# Altium PCB DC_DC.PcbDoc
Units mil, origin at the board's own origin, x right, y up, seen from the top; angles counter-clockwise.
Board outline 2140 x 1405 mil, 4 copper layers (Top Layer, Layer 1, Layer 2, Bottom Layer), stack 60.866 mil thick; 50 components, 27 nets, 171 pads, 174 vias.
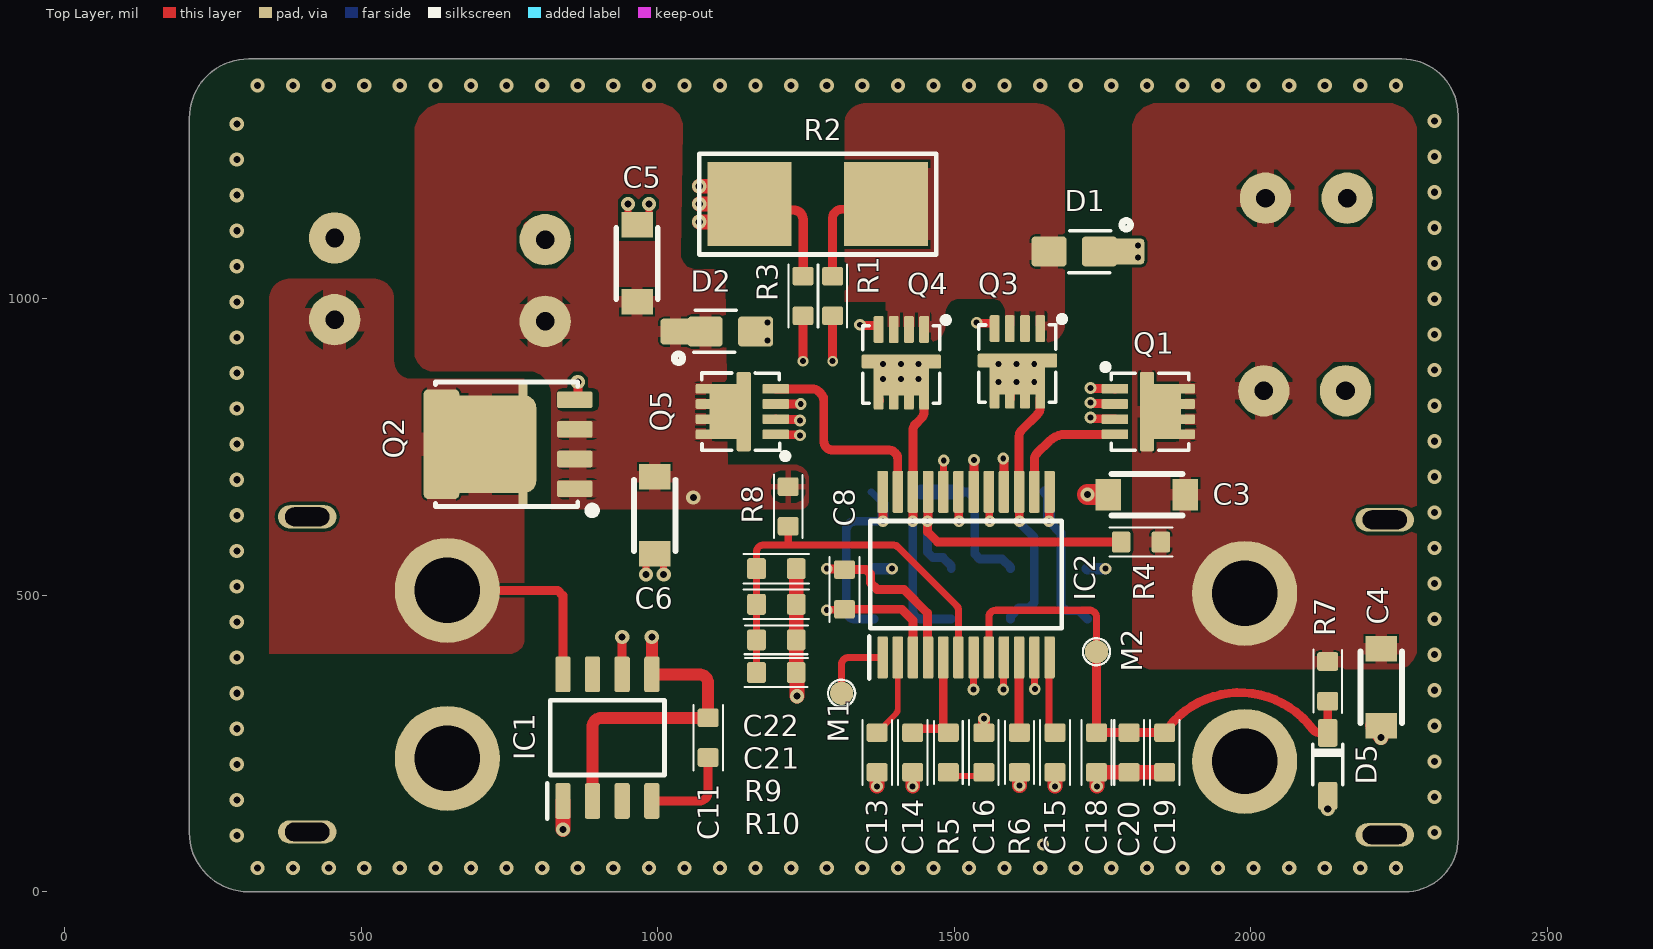
[diagram p0: Top Layer view]
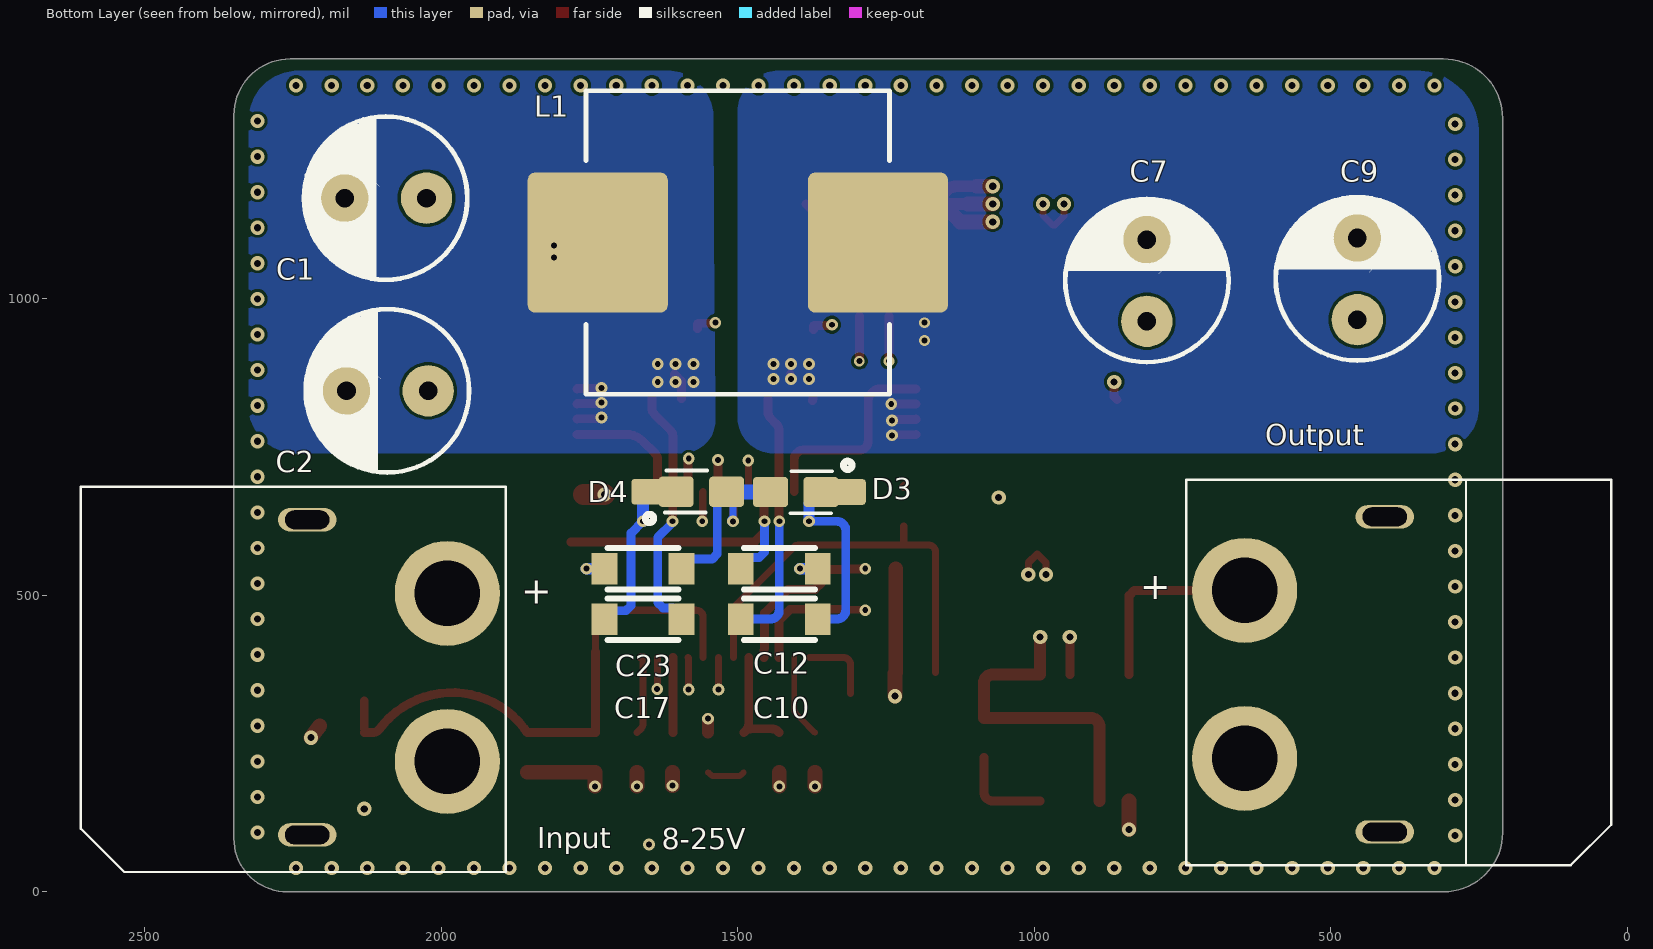
[diagram p1: Bottom Layer view, seen from below]
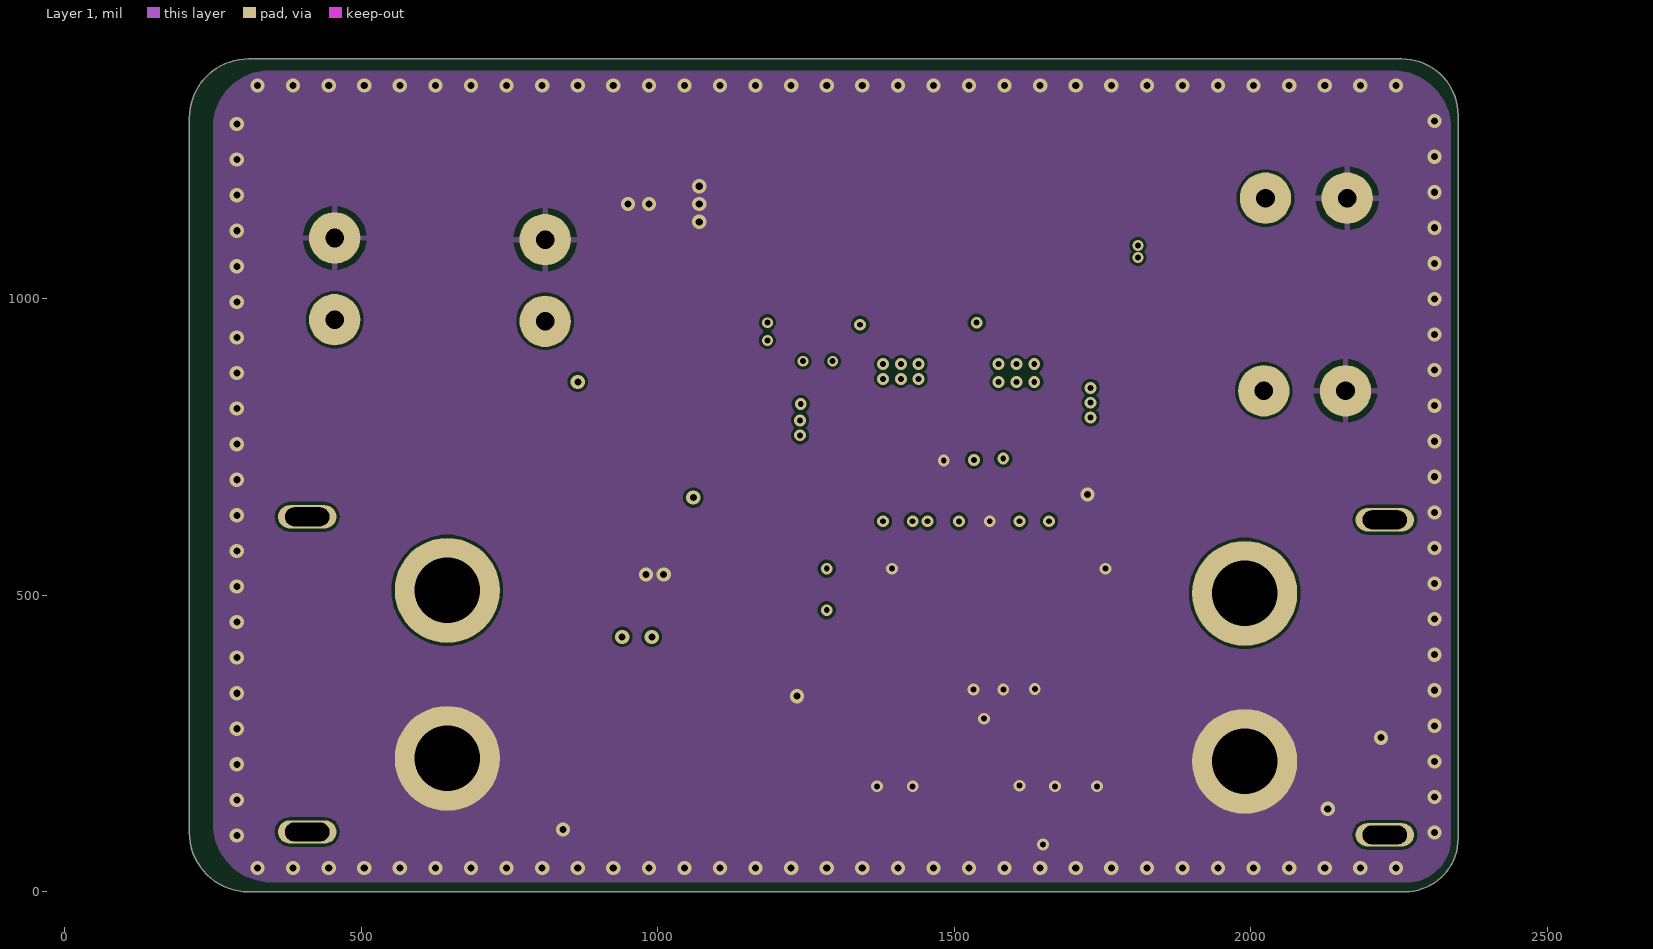
[diagram p2: Layer 1]
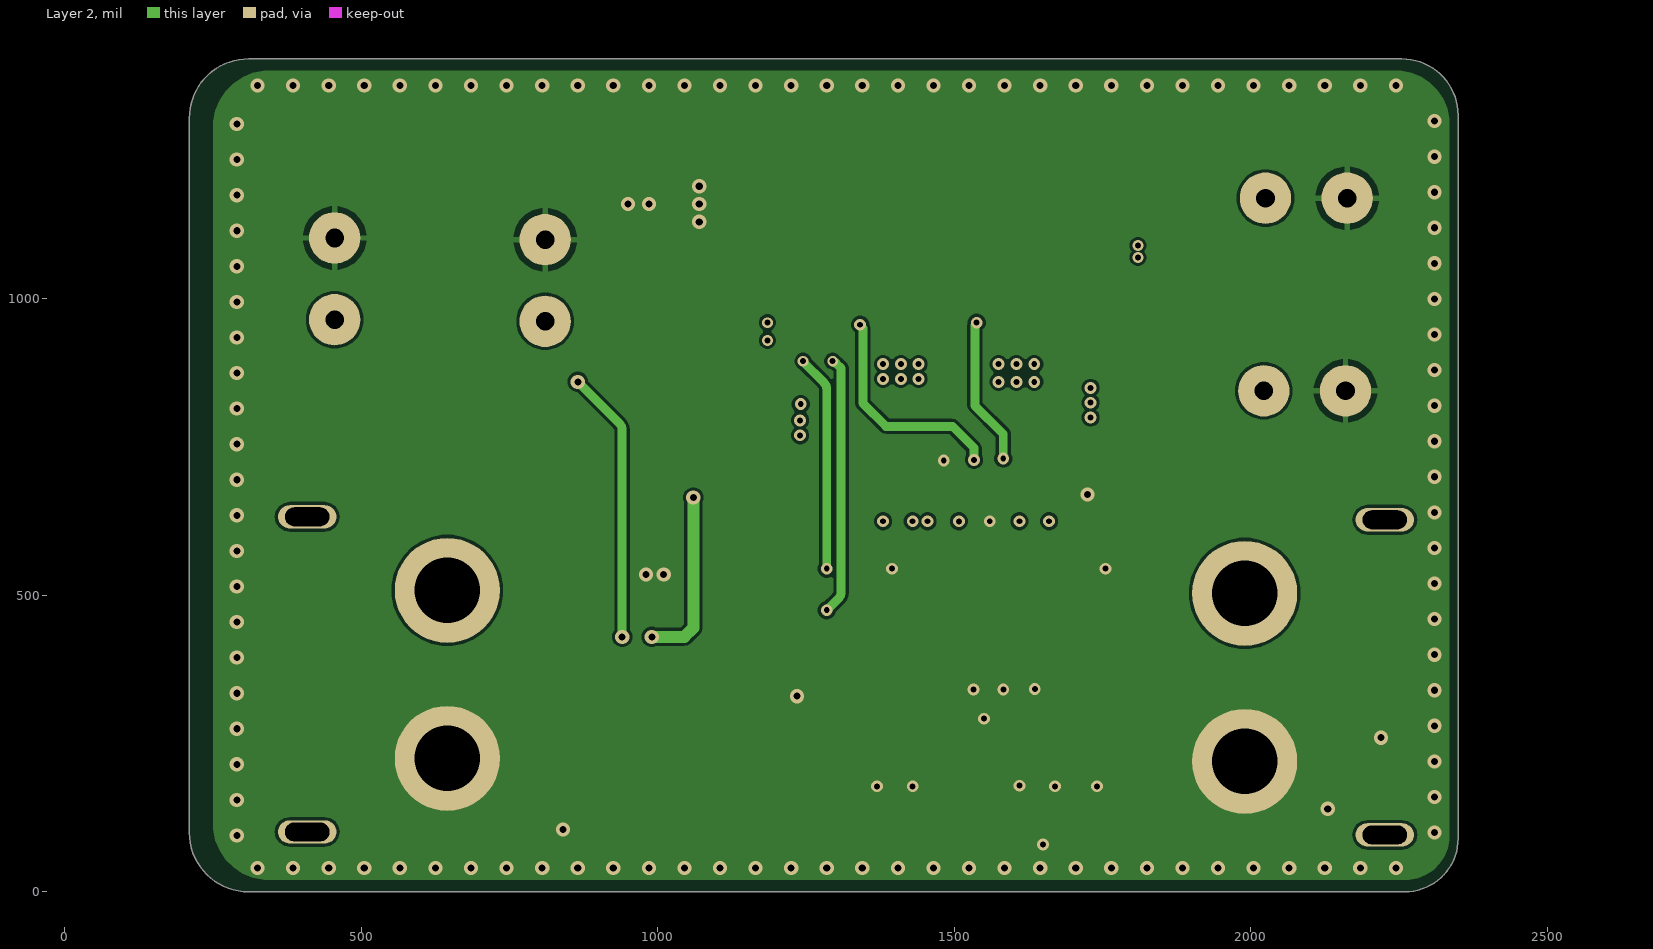
[diagram p3: Layer 2]
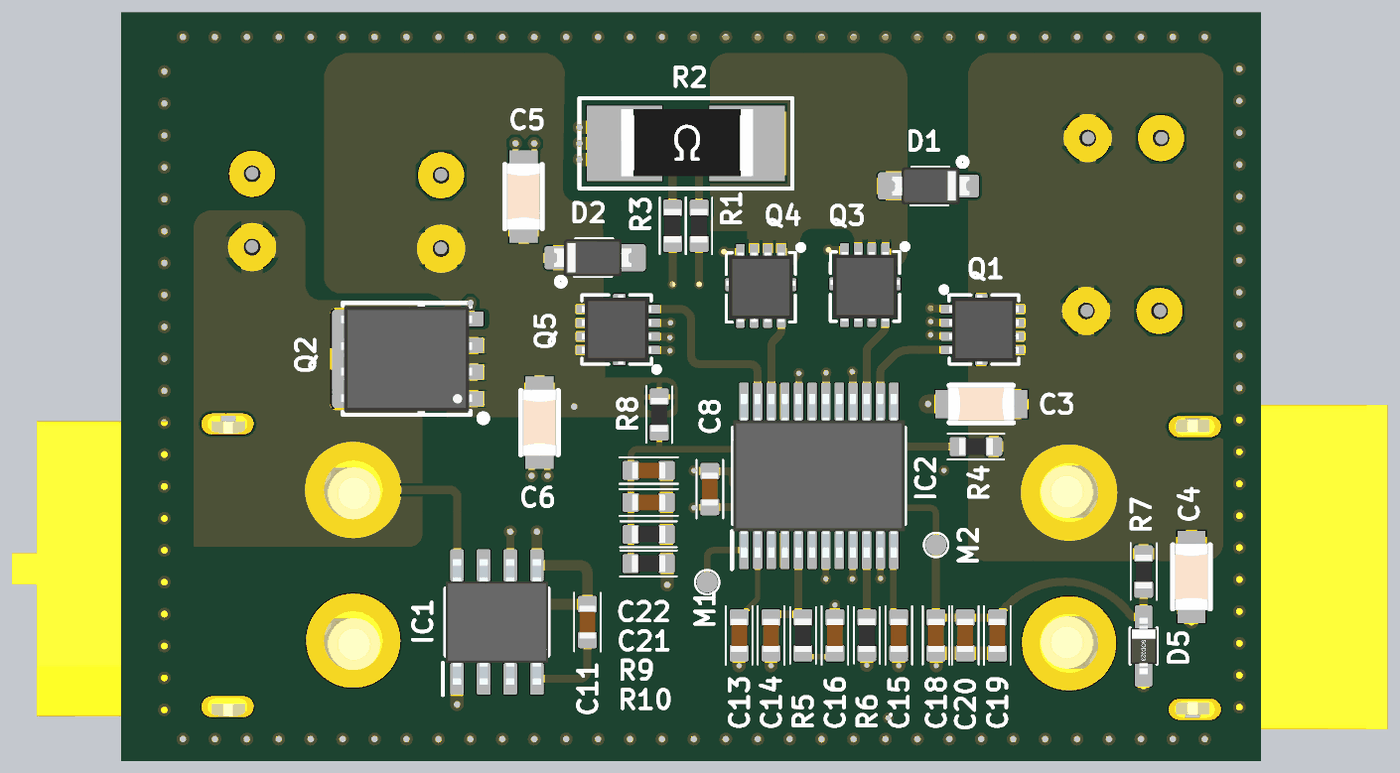
[diagram p4: 3D render of the assembled board from above, using the file's embedded part models]
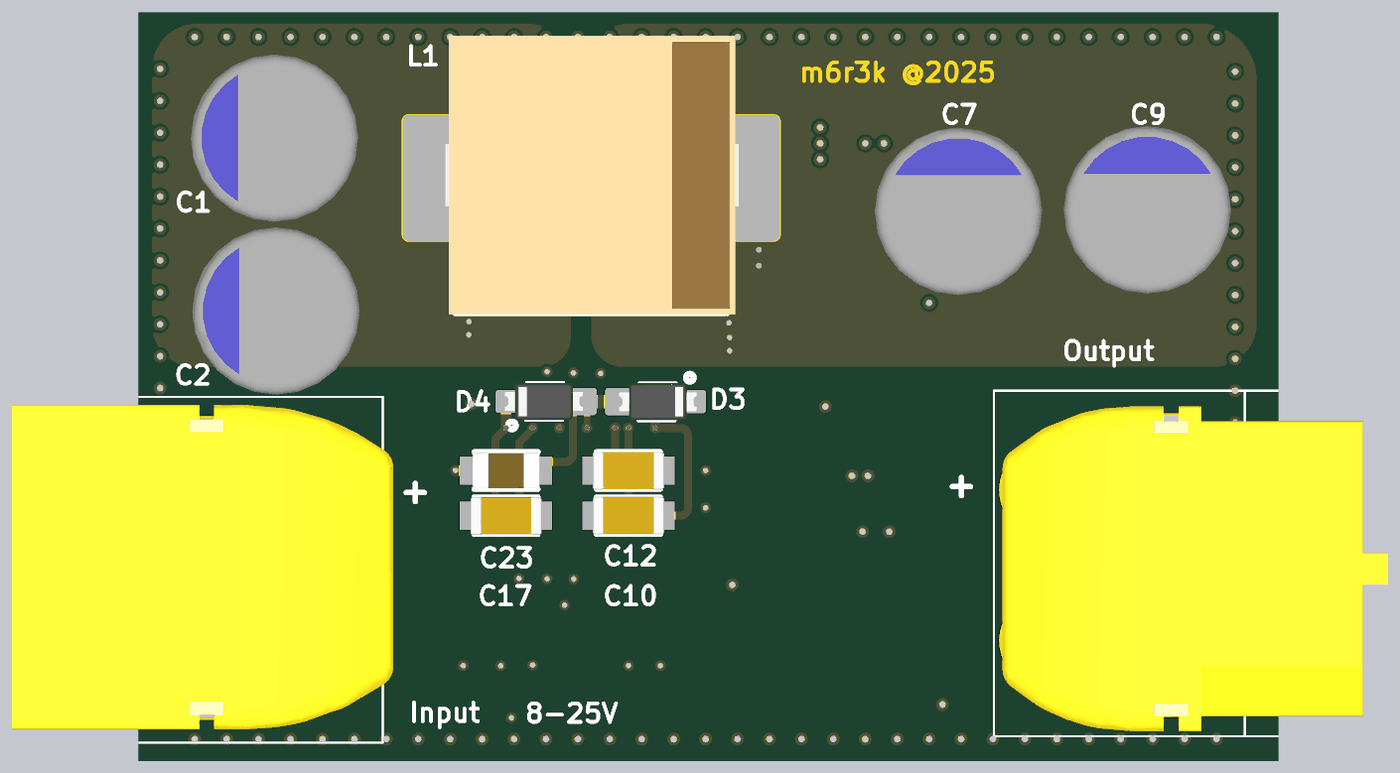
[diagram p5: 3D render of the assembled board from below, using the file's embedded part models]

## Layer stack, top to bottom
Top Solder: solder mask 0.4, Solder Resist, Dk 3.7
Top Layer: signal copper 1.378
Dielectric 4: prepreg 2.7165, PP-006, Dk 4.3
Dielectric 6: prepreg 2.7165, PP-006, Dk 4.3
Layer 1: signal copper 1.378
Dielectric 1: core 44.4882, FR-4, Dk 4.6
Layer 2: signal copper 1.378
Dielectric 7: prepreg 2.7165, PP-006, Dk 4.3
Dielectric 5: prepreg 2.7165, PP-006, Dk 4.3
Bottom Layer: signal copper 1.378
Bottom Solder: solder mask 0.4, Solder Resist, Dk 3.7

## Board outline
310,0 2260,0 ccw(c2260,90) 2350,90 2350,1310 ccw(c2255,1310) 2255,1405 310,1405 ccw(c310,1305) 210,1305 210,100 ccw(c310,100)

## Design rules (kind name [scope] priority, off if disabled: settings)
Clearance [All] p1: gap=4.92 ignorepadtopadclearanceinfootprint=FALSE
HoleSize [All] p1: absolutevalues=TRUE maxlimit=200 minlimit=7.87 maxpercent=80.000 minpercent=20.000
MinimumSolderMaskSliver [All] p1: minsoldermaskwidth=3
PolygonConnect [All] p1: connectstyle=Relief reliefconductorwidth=10 reliefentries=4 polygonreliefangle="90 Angle" airgapwidth=10
RoutingVias [All] p1: holewidth=28 width=50 viastyle="Through Hole" minholewidth=28 minwidth=50 maxholewidth=28 maxwidth=50
SilkToSolderMaskClearance [IsPad] p1: minsilkscreentomaskgap=3 clearancetoexposedcopper=TRUE
SolderMaskExpansion [All] p1: expansion=2 istentingtop=FALSE
Width [All] p1: maxlimit=70 minlimit=8 preferedwidth=12
27 further rules are at their usual default settings.

## Components (designator, comment, footprint, x,y, rotation, side; value= is the part's Value field where it differs from the comment)
C1 "35PZE150M8X9" PZF8x9 2025,1170 r0 bottom value=150uF/35V
C2 "35PZE150M8X9" PZF8x9 2022.2,845 r0 bottom value=150uF/35V
C3 "C1206C105K5RACTU" C1206_medium 1825,670 r0 top value=1u
C4 "C1206C105K5RACTU" C1206_medium 2220,345 r90 top value=1u
C5 "C1206C105K5RACTU" C1206_medium 965,1060 r270 top value=1u
C6 "C1206C105K5RACTU" C1206_medium 995,635 r90 top value=1u
C7 "25PZF220M8X9" PZF8x9 810,962.2 r90 bottom value=220uF/25V
C8 "GCM1885C2A470JA16J" C0603 1315,510 r270 top value="47p NP0"
C9 "25PZF220M8X9" PZF8x9 455,965 r90 bottom value=220uF/25V
C10 "C1206C224J1RACAUTO" C1206_thin 1430,460 r0 bottom value=220n
C11 "06035C104K4Z2A" C0603 1085,260 r90 top value=100n
C12 "GRT31C5C2A104JA12L" C1206_thin 1430,545 r180 bottom value=100n
C13 "AC0603KRX7R9BB223" C0603 1370,235 r90 top value="22n NP0"
C14 "GCM1885C2A470JA16J" C0603 1430,235 r90 top value="47p NP0"
C15 "C0603X103K1RAC3316" C0603 1670,235 r270 top value=10n
C16 "C0603X103K1RAC3316" C0603 1550,235 r270 top value=10n
C17 "C1206C224J1RACAUTO" C1206_thin 1660,460 r180 bottom value=220n
C18 "GCM1885C2A470JA16J" C0603 1740,235 r90 top value="47p NP0"
C19 "06035C104K4Z2A" C0603 1855,235 r90 top value=100n
C20 "CL10B475KQ8NQNC" C0603 1795,235 r270 top value=4.7u
C21 "06035C104K4Z2A" C0603 1200,485 r180 top value=100n
C22 "CL10B475KQ8NQNC" C0603 1200,545 r0 top value=4.7u
C23 "GRM31CC72A475ME11L" C1206_thick 1660,545 r0 bottom value=4.7uF
D1 "PMEG6030EXE-QX" SOD123HP 1725,1080 r0 top value=PMEG6030EXE
D2 "PMEG6030EXE-QX" SOD123HP 1100,945 r180 top value=PMEG6030EXE
D3 "NRVB0540T1G" SOD123HP 1379.63,674.39 r180 bottom
D4 "NRVB0540T1G" SOD123HP 1583.98,674.76 r0 bottom
D5 "PDZ3.6B,115" SOD323 2130,215 r90 top value=3V6
IC1 "LM74700D-Q1" SOIC127P600X175-8N 915,260 r90 top
IC2 "LTC3780IG#PBF" SOP65P780X200-24N 1520,535 r90 top
Input "XT60-PCB-M" XT60-PCB-M 1990,503.46 r180 bottom (schematic designator Input1)
L1 "7443551470" WE-HCI 1500,1095 r0 bottom value="4.7uH 13A"
M1 "TP" "Pad 1mm SMD" 1310,335 r0 top
M2 "TP" "Pad 1mm SMD" 1740,405 r0 top
Output "XT60-PCB-F" XT60-PCB-F 645,225 r0 bottom (schematic designator Output1)
Q1 "FDMC86102L" PowerPak1212_LFPAK33 1830,810 r270 top
Q2 "BSC077N12NS3 G" Power56_LFPAK 745.2,755 r90 top
Q3 "FDMC86102L" PowerPak1212_LFPAK33 1606.6,891 r180 top
Q4 "FDMC86102L" PowerPak1212_LFPAK33 1410.85,889.45 r180 top
Q5 "FDMC86102L" PowerPak1212_LFPAK33 1140,810 r90 top
R1 "CR0603-FX-10R0ELF" R0603 1295,1005 r270 top value=10R
R2 "GMR100HTBFER015" Shunt_2512 1270,1160 r0 top value=0R015
R3 "CR0603-FX-10R0ELF" R0603 1245,1005 r270 top value=10R
R4 "CR0603-FX-10R0ELF" R0603 1815,590 r180 top value=10R
R5 "RC0603FR-07100KL" R0603 1490,235 r270 top value=100k
R6 "CRGP0603F10K" R0603 1610,235 r270 top value=10K
R7 "CRGCQ0603F180K" R0603 2130,355 r270 top value=180K
R8 "RC0603FR-07100KL" R0603 1220,650 r270 top value=100k
R9 "CRGCQ0603F12K" R0603 1200,425 r0 top value=12K
R10 "CRGCQ0603F12K" R0603 1200,370 r0 top value=12K

## Footprints (in the part's own frame and the unit in brackets; to place one, negate y for a bottom-side part, rotate by r counter-clockwise, add the part's x,y. Pads: shape width x height; smd on the part's side, far side on the other; paste and mask are expansions set on the pad)
C0603 [mm]
  rrect25% 0.8x0.9 smd: 1(-0.85,0) 2(0.85,0)
  silkscreen extent -1.4,-0.64 1.4,0.64, body extent -0.8,-0.4 0.8,0.4, height 0.6
C1206_medium [mm]
  rect 1.1x1.35 smd: 1(-1.65,0) 2(1.65,0)
  silkscreen extent -1.52,-0.89 1.52,0.89, body extent -1.6,-0.8 1.6,0.8, height 1.26
C1206_thick [mm]
  rect 1.1x1.35 smd: 1(-1.65,0) 2(1.65,0)
  silkscreen extent -1.52,-0.89 1.52,0.89, body extent -1.6,-0.85 1.6,0.85, height 1.77
C1206_thin [mm]
  rect 1.1x1.35 smd: 1(-1.65,0) 2(1.65,0)
  silkscreen extent -1.52,-0.89 1.52,0.89, body extent -1.7,-0.91 1.7,0.89, height 1.01
"Pad 1mm SMD" [mm]
  round 1 smd mask+0.051: 1(0,0)
  silkscreen extent -0.58,-0.58 0.58,0.58
Power56_LFPAK [mil]
  rrect25% 28x60 smd: 1(-75,-114.8) 2(-25,-114.8) 3(25,-114.8) 4(75,-114.8)
  rrect25% 185x60 smd mask+4: 5(0,110)
  rrect25% 165x190 smd paste+0 mask+4: 5(0,45)
  rrect25% 208.66x15.75 smd paste-196.85 mask-196.85: 5(0,-27.5)
  silkscreen extent -117,-149 105,120, body extent -103,-123 103,123, height 44
PowerPak1212_LFPAK33 [mil]
  rrect25% 16.5x45 smd mask+2: 1(-38.4,-59) 2(-12.8,-59) 3(12.8,-59) 4(38.4,-59)
  rrect25% 16.5x34 smd mask+2: 5(-38.4,59) 5(-12.8,59) 5(12.8,59) 5(38.4,59)
  rrect25% 134x24 smd mask+2: 5(0,-5)
  rrect25% 93.31x69.29 smd mask+2: 5(0.01,17.78)
  silkscreen extent -77,-77 65,65, body extent -65,-65 65,65, height 44
PZF8x9 [mm]
  round 2.2 hole 0.8: 1(0,0) 2(3.5,0)
  silkscreen extent -1.75,-3.5 5.25,3.5, body extent -2.22,-4 5.78,4, height 9.01
R0603 [mm]
  rrect25% 0.8x0.9 smd: 1(-0.85,0) 2(0.85,0)
  silkscreen extent -1.36,-0.62 1.35,0.62, body extent -0.8,-0.4 0.8,0.4, height 0.4
Shunt_2512 [mm]
  rect 3.6x3.6 smd: 1(-2.921,0) 2(2.921,0)
  silkscreen extent -5.08,-2.16 5.08,2.16, body extent -3.09,-1.57 3.21,1.63, height 0.66
SOD123HP [mm]
  rrect25% 1.5x1.3 smd paste+0 mask+0.051: 1(-1.651,0) 2(0.508,0)
  rrect25% 1.3x1.1 smd paste+0 mask+0.051: 2(1.778,0)
  silkscreen extent -0.81,-0.91 1.83,1.32, body extent -1.72,-0.89 1.98,0.89, height 0.9
SOD323 [mil]
  rrect25% 47x33 smd paste+0 mask+2: 1(-53,0) 2(53,0)
  silkscreen extent -34,-25 34,25, body extent -53,-25 53,25, height 43
SOIC127P600X175-8N [mm]
  rrect25% 1.525x0.65 smd: 1(-2.712,1.905) 2(-2.712,0.635) 3(-2.712,-0.635) 4(-2.712,-1.905) 5(2.712,-1.905) 6(2.712,-0.635) 7(2.712,0.635) 8(2.712,1.905)
  silkscreen extent -3.47,-2.45 1.6,2.58, body extent -3,-2.45 3,2.45, height 1.75
SOP65P780X200-24N [mm]
  rrect25% 1.8x0.45 smd mask+0.051: 1(-3.55,3.575) 2(-3.55,2.925) 3(-3.55,2.275) 4(-3.55,1.625) 5(-3.55,0.975) 6(-3.55,0.325) 7(-3.55,-0.325) 8(-3.55,-0.975) 9(-3.55,-1.625) 10(-3.55,-2.275) 11(-3.55,-2.925) 12(-3.55,-3.575) 13(3.55,-3.575) 14(3.55,-2.925) 15(3.55,-2.275) 16(3.55,-1.625) 17(3.55,-0.975) 18(3.55,-0.325) 19(3.55,0.325) 20(3.55,0.975) 21(3.55,1.625) 22(3.55,2.275) 23(3.55,2.925) 24(3.55,3.575)
  silkscreen extent -4.45,-4.1 2.3,4.15, body extent -3.9,-4.1 3.9,4.1, height 2
WE-HCI [mm] "Würth Elektronik - Fixed Inductors"
  rrect10% 6x6 smd: 1(-6,0) 2(6,0)
  silkscreen extent -6.5,-6.5 6.5,6.5, body extent -7.04,-6.79 6.96,6.52, height 6.55
XT60-PCB-F [mm]
  round 4.5 hole 2.8: 1(0,-7.2) 2(0,0)
  oval 2.5x1 hole 0.8 slot 1.9 at 0 deg: 3(-6,-10.35) 4(-6,3.15)
  silkscreen extent -15.7,-11.94 2.5,4.57, body extent -16.31,-11.18 2.09,4.32, height 8.11
XT60-PCB-M [mm]
  round 4.5 hole 2.8: 1(0,0) 2(0,-7.2)
  oval 2.5x1 hole 0.8 slot 1.9 at 0 deg: 3(-6,-10.35) 4(-6,3.15)
  silkscreen extent -15.7,-11.94 2.5,4.57, body extent -15.2,-11.31 3,4.19, height 8.41

## Part data
C1 C2: "High temp hybrid capacitor -55/125C / 150uF/35V", Supplier Part Number 1=232-35PZE150M8X9, Category="Capacitors THT", Component Type=Capacitors, Main=Capacitors, SMD/THD=THT, Status=A, Supplier 1=Mouser, Supplier 2=Digi-Key, Supplier Part Number 2=35PZE150M8X9-ND
C3 C4 C5 C6: library part CC_1206_X7R_105, "Ceramic Capacitor X7R 50V", Supplier Part Number 1=81-GCJ31MR71H105KA2L, Supplier 1=Mouser, Supplier 2=Digi-Key, Supplier 3=Farnell, Supplier Part Number 2=490-5810-1-ND, Supplier Part Number 3=2781416
C7 C9: "High temp hybrid capacitor -55/125C / 220uF/25V", Supplier Part Number 1=232-25PZF220M8X9, Category="Capacitors THT", Component Type=Capacitors, Main=Capacitors, SMD/THD=THT, Status=A, Supplier 1=Mouser, Supplier 2=Digi-Key, Supplier Part Number 2=25PZF220M8X9-ND
C8 C14 C18: library part CC_0603_NP0_470, "Ceramic Capacitor NP0 100V", Supplier Part Number 1=81-GCM1885C2A470JA6J, Category="Capacitors CERA SMD", Component Type=Capacitors, ComponentLink1Description=datasheet, Main=Capacitors, SMD/THD=SMD, Status=A, Supplier 1=Mouser, Supplier 2=Farnell, Supplier Part Number 2=3784365
C10 C17: library part CC_1206_X7R_224, "Ceramic Capacitor X7R 100V", Supplier Part Number 1=80-C1206C224J1RAUTO, Supplier 1=Mouser, Supplier 2=Digi-Key, Supplier Part Number 2=399-C1206C224J1RACAUTOCT-ND
C11 C19 C21: library part CC_0603_X7R_104, "Ceramic Capacitor X7R 50V", Manufacturer Part Number="100n/50V X7R C0603", Supplier Part Number 1=581-06035C104K4Z2A, Category="Capacitors CERA SMD", Component Type=Capacitors, Main=Capacitors, Part Number="100n/50V X7R C0603", SMD/THD=SMD, Status=A, Supplier 1=Mouser, Supplier 2=Farnell, Supplier Part Number 2=1833843
C12: library part CC_1206_NP0_104, "Ceramic Capacitor NP0 100V", Supplier Part Number 1=81-GRT31C5C2A104JA2L, Supplier 1=Mouser, Supplier 2=Digi-Key, Supplier Part Number 2=490-GRT31C5C2A104JA12LDKR-ND
C13: library part CC_0603_X7R_223, "Ceramic Capacitor NP0 50V", Manufacturer Part Number="22n/50V X7R C0603", Supplier Part Number 1=603-AC603KRX7R9BB223, Category="Capacitors CERA SMD", Component Type=Capacitors, Main=Capacitors, Part Number="22n/50V X7R C0603", SMD/THD=SMD, Status=A, Supplier 1=Mouser, Supplier 2=Farnell, Supplier 3=Digi-Key, Supplier Part Number 2=3368998, Supplier Part Number 3=311-3119-6-ND
C15 C16: library part CC_0603_X7R_103, "Ceramic Capacitor X7R 100V", Part Number="10n/100V X7R C0603", Supplier Part Number 1=80-C0603X103K1R3316, Category="Capacitors CERA SMD", Component Type=Capacitors, Main=Capacitors, SMD/THD=SMD, Status=A, Supplier 1=Mouser, Supplier 2=Digi-Key, Supplier 3=Farnell, Supplier 4=TME, Supplier Part Number 2=399-C0603X103K1RAC3316CT-ND, Supplier Part Number 3=2666889, Supplier Part Number 4=C0603X103K1RAC3316
C20 C22: library part CC_0603_X7R_475, "Ceramic Capacitor X7R 6.3V", Supplier Part Number 1=187-CL10B475KQ8NQNC, Category="Capacitors CERA SMD", Component Type=Capacitors, ComponentLink1Description=datasheet, Main=Capacitors, SMD/THD=SMD, Status=A, Supplier 1=Mouser
C23: library part CC_1206_X7S_475, "Ceramic Capacitor X7S 100V", Supplier Part Number 1=81-GRM31CC72A475ME11, Supplier 1=Mouser, Supplier 2=Digi-Key, Supplier Part Number 2=490-18621-6-ND
D1 D2: "Schottky Diode 60V, 3A", Supplier Part Number 1=1727-PMEG6030EXE-QXCT-ND, Category=Schottky, Main=Diodes, SMD/THD=SMD, Status=A, Supplier 1=Digikey, Supplier 2=Mouser, Supplier Part Number 2=771-PMEG6030EXE-Q
D3 D4: "Schottky Diode 40V, 500mA", Supplier Part Number 1=863-NRVB0540T1G, Category=Schottky, Main=Diodes, SMD/THD=SMD, Status=A, Supplier 1=Mouser, Supplier 2=Farnell, Supplier Part Number 2=2723913
D5: "Zener Diode 3.6V, 400mW", Supplier Part Number 1=771-PDZ36B8115, Category=Zener, Main=Diodes, SMD/THD=SMD, Status=A, Supplier 1=Mouser, Supplier 2=TME, Supplier Part Number 2=PDZ3.6B.115
IC1: "Reverse Battery Protection Ideal Diode Controller"
IC2: "DC/DC Buck-Boost", Manufacturer_Name="Analog Devices", Supplier Part Number 1=584-LTC3780IG#PBF, Height=2mm, Manufacturer_Part_Number=LTC3780IG#PBF, Supplier 1=Mouser, Supplier 2=TME, Supplier Part Number 2=LTC3780IGPBF
Input Output: "XT60 Connector", Manufacturer_Name=Amass, Manufacturer_Part_Number=XT30PB, Datasheet Link=https://www.tme.eu/Document/4acc913878197f8c2e30d4b8cdc47230/XT30UPB%20SPEC.pdf, Height=10.7mm
L1: library part "WE-HCI High Current 4.7uH-13A", "WE-HCI SMT High Current Inductor 4.7uH 20% 100kHz Ferrite 13A SMD T/R  / Frequency - Self Resonant 30MHz", Supplier Part Number 1=732-7443551470CT-ND, Supplier 1=Digikey, Supplier 2=Mouser, Supplier Part Number 2=710-7443551470
M1 M2: library part TP_PCB, "Test Point", Category=Pads_Pins_Measure_Points, Component Type=Mechanical, Main=Mechanical, Stock number=--------
Q1 Q3 Q4 Q5: "Single N-Channel 100V, 18A, 23mOhm", Manufacturer="ON Semiconductor / Fairchild", Supplier Part Number 1=512-FDMC86102L, Category=N-MOS, Component Type=Transistors, ComponentLink1Description=Datasheet, ComponentLink1URL=http://www.farnell.com/datasheets/1837750.pdf, Main=Transistors, Manufacturer Part Number=FDMC86102L, Part Number=FDMC86102L, SMD/THD=SMD, Status=A, Supplier 1=Mouser, Supplier 2=Digi-Key, Supplier Part Number 2=FDMC86102LFSCT-ND
Q2: "Single N-Channel 120V, 98A, 7.7mOhm", Manufacturer=Infineon, Manufacturer Part Number=BSC077N12NS3G, Supplier Part Number 1=726-BSC077N12NS3GATM, Category=N-MOS, Component Type=Transistors, ComponentLink1Description=Datasheet, ComponentLink1URL=http://datasheet.octopart.com/BSC077N12NS3-G-Infineon-datasheet-62293626.pdf, Main=Transistors, Part Number="BSC077N12NS3 G", SMD/THD=SMD, Status=A, Supplier 1=Mouser, Supplier 2=Digi-Key, Supplier Part Number 2=BSC077N12NS3GATMA1CT-ND
R1 R3 R4: library part CR_0603_100, "Resistor 1%, 0.1W, 75V", Supplier Part Number 1=652-CR0603FX-10R0ELF, Category="Resistors SMD", Component Type=Resistors, Main=Resistors, SMD/THD=SMD, Status=A, Supplier 1=Mouser, Supplier 2=Farnell, Supplier 3=Digi-Key, Supplier Part Number 2=2321756, Supplier Part Number 3=CR0603-FX-10R0ELFDKR-ND
R2: library part SHUNT_2512_0R015, "Current Sense Resistor 1%, 3W, AEC-Q200", Supplier Part Number 1=755-GMR100HTBFER015, Category="Resistors SMD", Component Type=Resistors, Main=Resistors, SMD/THD=SMD, Status=A, Supplier 1=Mouser, Supplier 2=Digi-Key, Supplier 3=Farnell, Supplier Part Number 2=511-1687-1-ND, Supplier Part Number 3=2808331
R5 R8: library part CR_0603_104, "Resistor 1%, 0.1W, 75V", Supplier Part Number 1=603-RC0603FR-07100KL, Category="Resistors SMD", Component Type=Resistors, Main=Resistors, SMD/THD=SMD, Status=A, Supplier 1=Mouser, Supplier 2=Farnell, Supplier 3=TME, Supplier Part Number 2=9238727, Supplier Part Number 3=RC0603FR-07100K
R6: library part CR_0603_103, "Resistor 1%, 0.1W, 75V", Supplier Part Number 1=279-CRGP0603F10K, Category="Resistors SMD", Component Type=Resistors, Main=Resistors, SMD/THD=SMD, Status=A, Supplier 1=Mouser, Supplier 2=Digi-Key, Supplier 3=Farnell, Supplier Part Number 2=A130428CT-ND, Supplier Part Number 3=2861046
R7: library part CR_0603_184, "Resistor 1%, 0.1W, 75V", Supplier Part Number 1=279-CRGCQ0603F180K, Category="Resistors SMD", Component Type=Resistors, Main=Resistors, SMD/THD=SMD, Status=A, Supplier 1=Mouser, Supplier 2=Digi-Key, Supplier 3=Farnell, Supplier Part Number 2=A129715CT-ND, Supplier Part Number 3=2861488
R9 R10: library part CR_0603_123, "Resistor 1%, 0.1W, 75V", Supplier Part Number 1=279-CRGCQ0603F12K, Category="Resistors SMD", Component Type=Resistors, Main=Resistors, SMD/THD=SMD, Status=A, Supplier 1=Mouser, Supplier 2=Digi-Key, Supplier 3=Farnell, Supplier Part Number 2=A129701CT-ND, Supplier Part Number 3=2861474

## Via types
v1: diameter 24, hole 12, Top Layer to Bottom Layer, tented both sides, 124 vias
v2: diameter 20, hole 10, Top Layer to Bottom Layer, tented both sides, 44 vias
v3: diameter 18, hole 10, Top Layer to Bottom Layer, tented both sides, 6 vias

## Nets (pads, with @x,y where several pads share a name; then routed paths per layer and width w, separated by ;. In a path a pad name is that pad's centre, name@x,y a point inside that pad or via, vN(x,y) a via of type N, cw(c..) or ccw(c..) an arc to the next point about the centre after c; other vN are vias at no path point)
GND: C1.2 C2.2 C3.1 C4.1 C5.1 C6.1 C7.2 C9.2 C12.2 C13.1 C14.1 C15.2 C16.1 C18.1 C19.1 C20.2 C21.1 C22.2 C23.2 D5.1 IC1.1 IC2.7 IC2.9 IC2.11 IC2.17 IC2.20 Input.2 Output.2 R2.1 R3.1 R6.2 R9.2 R10.2 | length 1594.4
  Top Layer w12: v1(950,1160) 950,1139.96 C5.1 969.35,1124.96 985,1140.61 v1(985,1160) ; v1(980,535) 980,555.04 C6.1 1010,555.04 v1(1010,535) ; IC2.20 1482,675.15 1482,727.27 v2(1482.39,727.66) ; v2(1532.81,341.1) 1532.81,365.8 IC2.7 ; IC2.17 1559.19,673.96 1559.19,625.81 v2(1560,625) ; v2(1582.81,341.1) 1583.4,341.68 1583.4,394.65 IC2.9 ; IC2.11 1635.54,394.85 1635.54,342.35 v2(1635.92,341.97)
  Top Layer w15: v2@1547.8,292 v2(1550,292)
  Top Layer w16: R2.1 1165,1150 1229,1150 cw(c1229,1134) 1245,1134.06 R3.1
  Top Layer w20: R2.1@1097.5,1190 1131.72,1190 cw(c1131.72,1170) 1145.83,1184.17 1149.17,1180.83 cw(c1135,1166.72) 1155,1166.72 R2.1 R2.1@1112.5,1160 ; C16.1 v2(1550,292)
  Top Layer w25: C7.2@785.04,1120 C7.2 ; v1(840,105) IC1.1 ; v1(1070,1130) 1125,1130 R2.1 ; v1(1070,1160) R2.1@1112.5,1160 ; v1(1070,1190) R2.1@1097.5,1190 ; C22.2 C21.1 R9.2 R10.2 1235,368.46 v1(1235,330) ; v2(1370,178) C13.1 ; v2(1430,178) C14.1 ; v2(1610,179) R6.2 ; v2(1670,178) C15.2 ; v2(1740.59,178) 1740.59,200.94 1740.3,201.24 1740.59,201.54 C20.2 C19.1 ; C4.1@2205,280.04 2210.39,272.84 v1(2220,260)
  Top Layer w35: v1(1725,670.1) 1759.94,670.1 C3.1
  Bottom Layer w20: C12.2 v2(1395,545) ; C23.2 v2(1755,545)
  other v1: 325,40 385,40 445,40 505,40 565,40 625,40 685,40 745,40 805,40 865,40 925,40 985,40 1045,40 1105,40 1165,40 1225,40 1285,40 1345,40 1405,40 1465,40 1525,40 1585,40 1645,40 1705,40 1765,40 1825,40 1885,40 1945,40 2005,40 2065,40 2125,40 2185,40 2245,40 290,95 2310,100 2130,140 290,155 2310,160 290,215 2310,220 290,275 2310,280 290,335 2310,340 290,395 2310,400 290,455 2310,460 290,515 2310,520 290,575 2310,580 290,635 2310,640 290,695 2310,700 290,755 2310,760 290,815 2310,820 290,875 2310,880 290,935 2310,940 290,995 2310,1000 290,1055 2310,1060 290,1115 2310,1120 290,1175 2310,1180 290,1235 2310,1240 290,1295 2310,1300 325,1360 385,1360 445,1360 505,1360 565,1360 625,1360 685,1360 745,1360 805,1360 865,1360 925,1360 985,1360 1045,1360 1105,1360 1165,1360 1225,1360 1285,1360 1345,1360 1405,1360 1465,1360 1525,1360 1585,1360 1645,1360 1705,1360 1765,1360 1825,1360 1885,1360 1945,1360 2005,1360 2065,1360 2125,1360 2185,1360 2245,1360
  other v2: 1650,80
NetC1_1: C1.1 C2.1 C3.2 C4.2 Input.1 Q1.5 R4.1 R7.1 | length 18.3
  Bottom Layer w15: Input.1@1973.55,510 cw(c1973.55,495) 1984.16,505.61 Input.1@1988.78,500.98
NetC5_2: C5.2 C6.2 C7.1 C11.2 D2.2 IC1.2 IC1.5 Q2.1 Q2.2 Q2.3 Q5.5 R8.1 | length 851.2
  Top Layer w15: R8.1@1219.23,684.23 R8.1
  Top Layer w20: IC1.2 890,278.46 cw(c905,278.46) 905,293.46 C11.2 1085,351.77 ccw(c1070,351.77) 1070,366.77 IC1.5 v1(990,430)
  Layer 2 w20: v1(990,430) 1045,430 1060,445 v1(1060,665)
NetC8_1: C8.1 IC2.4 R3.2 | length 725.8
  Top Layer w15: v3(1245,895) R3.2 ; v2(1285,545) 1285.77,544.23 1314.23,544.23 C8.1 1351.55,543.46 1358.58,536.44 1358.58,521.42 1370,510 1415,510 1455,470 1455,423.17 IC2.4
  Layer 1 w15: v3@1245,894.19 v3(1245,895)
  Layer 2 w15: v3@1245,894.19 1280.61,858.58 cw(c1270,847.98) 1285,847.98 v2@1285,546.35
NetC8_2: C8.2 IC2.3 R1.2 | length 729.8
  Top Layer w12: v2(1285,475) 1285.77,475.77 1314.23,475.77 C8.2
  Top Layer w15: v3(1295,895) R1.2 ; C8.2 1411.71,476.54 1430.43,457.81 IC2.3
  Layer 1 w15: v3@1295.6,895 cw(c1286.91,886.13) v3@1295.66,894.94
  Layer 2 w15: v2(1285,475) 1305,495 ccw(c1294.39,505.61) 1309.39,505.61 1309.39,882.86 1300.61,891.65 1299.17,891.65 1295.81,895 v3(1295,895)
NetC9_1: C9.1 IC1.8 Output.1 Q2.5 | length 331.5
  Top Layer w15: Output.1 831.21,508.46 840,499.68 IC1.8
NetC10_1: C10.1 D3.2 IC2.24 | length 369.7
  Top Layer w15: IC2.24 1379.63,674.39 1379.63,625.37 v2(1380,625)
  Bottom Layer w12: D3.2@1359.63,674.39 1360.44,674.39 D3.2@1380,654.83
  Bottom Layer w15: C10.1 1332.92,460 cw(c1332.92,475) 1317.92,475 1317.92,610 cw(c1332.92,610) 1332.92,625 v2(1380,625)
  Bottom Layer w18: v2(1380,625) D3.2@1380,654.83
NetC10_2: C10.2 D2.1 IC2.22 L1.1 Q4.5 Q5.1 Q5.2 Q5.3 | length 572.9
  Top Layer w15: Q5.1 1199.75,770.85 1239.15,770.85 v2(1240,770) ; Q5.2 1199.75,796.45 1237.2,796.45 1238.65,795 v2(1240,795) ; Q5.3 1199.12,822.68 1241.05,822.68 v2(1241.16,822.57) ; Q4.5@1373.2,832 1373.5,830.69 Q4.5@1373.95,828.78 ; v2(1410,865) 1411.28,871.59 Q4.5@1411.59,873.22 ; v2(1430,625) 1430.22,625.22 IC2.22@1430.22,674.55 ; IC2.22 1430.43,778.35 cw(c1445.43,778.35) 1434.82,788.95 1444.9,799.03 ccw(c1434.25,809.6) 1449.25,809.6 Q4.5@1449.25,830.45
  Bottom Layer w15: v2(1430,625) 1430,475 ccw(c1445,475) 1445,460 C10.2
  other v2: 1380,865 1440,865 1380,890 1410,890 1440,890
  other v3: 1185,930 1185,960
NetC11_1: C11.1 IC1.4 | length 161.9
  Top Layer w15: IC1.4 1070,153.23 ccw(c1070,168.23) 1085,168.23 C11.1
NetC12_1: C12.1 IC2.21 R4.2 | length 508.2
  Top Layer w15: IC2.21 1455.51,674.25 1455.51,625.51 v2(1455,625) 1455,607.11 1472.11,590 R4.2
  Bottom Layer w15: v2(1455,625) 1455,572.66 1463.79,563.87 1480.81,563.87 1494.96,549.72 C12.1
NetC13_2: C13.2 IC2.2 | length 140.8
  Top Layer w10: C13.2 1380.94,279.21 cw(c1389,273.44) 1381.97,280.43 1401.95,300.41 ccw(c1394.84,307.45) 1404.84,307.45 IC2.2
NetC14_2: C14.2 IC2.5 R5.1 | length 193.7
  Top Layer w15: C14.2 1432.14,270.61 cw(c1442.75,260) 1442.75,275 1477.25,275 cw(c1477.25,260) 1487.86,270.61 R5.1 1486.01,272.46 1485.96,272.5 cw(c1496.61,283.06) 1481.61,283.06 IC2.5
NetC15_1: C15.1 IC2.12 | length 122.2
  Top Layer w12: IC2.12@1660,385.7 1660,283.44 ccw(c1672,283.44) 1663.51,274.95 C15.1
  Top Layer w15: IC2.12 IC2.12@1662.11,395.32
NetC16_2: C16.2 R5.2 | length 64.6
  Top Layer w10: R5.2 1493.61,197.93 ccw(c1500.68,205) 1500.68,195 1539.32,195 ccw(c1539.32,205) 1546.39,197.93 C16.2
NetC17_1: C17.1 D4.2 IC2.13 | length 307.5
  Top Layer w15: v2(1660,625) 1660.37,625.37 1660.37,674.39 IC2.13 IC2.13@1660.98,675
  Bottom Layer w15: v2(1660,625) 1680,605 1680,482.94 1688.79,474.15 1710.81,474.15 C17.1
  Bottom Layer w20: D4.2@1653.98,674.76 1660,668.74 v2(1660,625)
NetC17_2: C17.2 D1.2 IC2.15 L1.2 Q1.1 Q1.2 Q1.3 Q3.5 | length 607.5
  Top Layer w15: Q3.5@1595,832 1595,861.63 1606.59,873.22 v2(1605,860) ; v2(1610,625) 1609.78,625.22 1609.78,674.55 IC2.15 1609.57,768.41 cw(c1624.57,768.35) 1613.92,778.92 1640.61,805.61 ccw(c1630,816.21) 1645,816.21 Q3.5@1645,832 ; v2(1730,800) 1731.35,800 1733.4,797.95 1770.25,797.95 Q1.3 ; v2(1730,825) 1731.35,825 1732.8,823.55 1770.25,823.55 Q1.2 ; v2(1730,850) 1730.85,849.15 1770.25,849.15 Q1.1
  Bottom Layer w15: C17.2 1595.04,464.72 1609.19,478.87 1626.21,478.87 1635,487.66 1635,597.76 1610.96,621.8 1610.96,624.04 v2(1610,625)
  other v2: 1575,860 1635,860 1575,890 1605,890 1635,890
  other v3: 1810,1070 1810,1090
NetC18_2: C18.2 C19.2 C20.1 D5.2 IC2.8 M2.1 R7.2 | length 937.8
  Top Layer w12: IC2.8 1558.39,463.05 cw(c1570.39,463) 1570.34,475 1728,475 cw(c1728,463) 1740,463 M2.1
  Top Layer w15: M2.1 C18.2 C20.1 C19.2 1860.95,276.71 cw(c1981.84,183.16) 2104.45,274.45 ccw(c2116.43,283.46) 2116.36,268.46 D5.2@2129.33,268.46 ; D5.2@2130,275 2130,279.61 R7.2
NetC21_2: C21.2 C22.1 IC2.6 R8.2 R9.1 R10.1 | length 709.1
  Top Layer w12: R10.1 R9.1 C21.2 1166.54,573 cw(c1178.54,573) 1178.54,585 1220,585 ; R8.2 1220,585 ; IC2.6 1507.2,474.64 ; 1507.2,474.69 ccw(c1495.2,474.64) 1503.72,483.1 1405.29,581.53 ccw(c1396.85,573) 1396.85,585 1220,585
NetC23_1: C23.1 D3.1 D4.1 IC2.19 | length 360.7
  Top Layer w15: IC2.19 1507.62,674.35 1507.62,625.37 v2(1508.04,624.95)
  Bottom Layer w12: v2(1508.04,624.95) D4.1@1508.04,674.58
  Bottom Layer w15: D3.1 D3.1@1444.81,674.58 ; D4.1@1508.04,674.58 1523.1,674.58 1534.61,663.07 1534.61,570.07 1543.39,561.28 1580.89,561.28 1595.04,547.13 C23.1
  Bottom Layer w18: v2@1508.99,625.21 v2@1508.99,626.28
  Bottom Layer w25: D3.1@1444.81,674.58 D4.1@1508.04,674.58
NetD1_1: D1.1 Q3.1 Q3.2 Q3.3 Q4.1 Q4.2 Q4.3 R1.1 R2.2 | length 200
  Top Layer w15: R1.1 1295,1136.21 cw(c1310,1136.21) 1310,1151.21 1376.21,1151.21 R2.2
NetIC1_6: IC1.6 Q2.4 | length 555.7
  Top Layer w15: Q2.4 865.2,835.2 v1(865.2,860) ; IC1.6 v1(940,430)
  Layer 2 w15: v1(865.2,860) 935.61,789.59 cw(c925,778.98) 940,778.98 v1(940,430)
NetIC2_1: IC2.1 M1.1 | length 124.3
  Top Layer w12: M1.1 1310,383.29 cw(c1322,383.24) 1321.95,395.24 IC2.1
NetIC2_10: IC2.10 R6.1 | length 127
  Top Layer w10: R6.1@1609.57,268.9 R6.1
  Top Layer w15: R6.1@1609.57,268.9 IC2.10
NetIC2_14: IC2.14 Q1.4 | length 209
  Top Layer w15: IC2.14 1635.16,729 cw(c1650.16,728.94) 1639.51,739.51 1660,760 cw(c1688,732) 1688,771.6 Q1.4
NetIC2_16: IC2.16 Q3.4 | length 345.3
  Top Layer w15: v2(1537.97,959.92) 1538.92,958.96 1567.45,958.96 1568.2,958.21 Q3.4 ; IC2.16 v2@1583.98,730.7
  Layer 2 w15: v2(1537.97,959.92) 1537.97,958.57 1535,955.6 1535,820 1582.78,772.22 v2(1582.78,730.7)
NetIC2_18: IC2.18 Q4.4 | length 465
  Top Layer w15: v2(1341.38,956.41) 1342.33,955.46 1371.7,955.46 1372.45,954.71 Q4.4 ; IC2.18@1532.83,674.91 1533.09,675.17 1533.09,728.17 v2(1533.39,728.47)
  Layer 2 w15: v2(1341.38,956.41) 1341.38,955.06 1345.89,950.55 1345.89,824.11 1385,785 1497.09,785 1533.39,748.7 v2(1533.39,728.47)
NetIC2_23: IC2.23 Q5.4 | length 357.7
  Top Layer w15: Q5.4 1260.73,848.4 cw(c1260.73,833.4) 1271.33,844.01 1275.61,839.74 cw(c1265,829.13) 1280,829.13 1280,760 ccw(c1295,760) 1295,745 1389.84,745 cw(c1389.84,730) 1404.84,730 IC2.23
pads on no net: IC1.3 IC1.7 Input.3 Input.4 Output.3 Output.4

## Polygon pours and split planes (outlines as drawn)
NetC9_1 on Top Layer "NONET_L-01_P-001" (solid, pour order 12): 378.9,1033.9 521.1,1033.9 cw(c521.1,1000) 555,1000 555,895 ccw(c585,895) 585,865 774.91,865 774.92,636.72 774.92,426.72 cw(c749.93,426.7) 749.92,401.72 345,401.72 345,1000 cw(c378.9,1000)
NetD1_1 on Top Layer " " (solid, pour order 11): 1485,976.95 1485,955 cw(c1457.27,954.98) 1457.26,927.26 1384.86,927.26 1384.86,995 1315,995 1315,1295 cw(c1350,1295) 1350,1330 1635,1330 cw(c1635,1278.48) 1686.52,1278.48 1686.52,1026.96 1686.52,956.52 cw(c1657.29,956.49) 1657.26,927.26 1585.66,927.26 1585.66,979.34 ccw(c1565,979.34) 1565,1000 1508.04,1000 ccw(c1508.02,976.98)
NetC1_1 on Top Layer "NETC1_1_L01_P006" (solid, pour order 6): 2280,410 2280,1280 ccw(c2230,1280) 2230,1330 1845,1330 ccw(c1845,1285) 1800,1285 1800,1030 1800,410 ccw(c1835,410) 1835,375 2245,375 ccw(c2245,410)
NetC5_2 on Top Layer "NETC5_2_L01_P005" (solid, remove dead copper, pour order 5): 1254.97,660.52 1255,695 ccw(c1230.03,695) 1230,720 1118.18,720 1113.75,1026.52 ccw(c1089.93,1026.18) 1089.93,1050 1064.74,1050 cw(c1064.74,1076.12) 1038.62,1076.59 1042.33,1287.27 ccw(c1000.35,1288.01) 1000.35,1330 640,1330 ccw(c640,1280) 590,1280 590,1045 590,910 ccw(c621.59,910) 621.59,878.41 781.59,878.41 cw(c781.59,840) 820,840 820,645 1239.45,645 ccw(c1239.45,660.51)
NetC17_2 on Bottom Layer "NETC17_2_L04_P003" (solid, pour order 3): 1620.2,1385 2239.99,1385.01 cw(c2239.99,1300) 2325,1300 2325,820 cw(c2245,820) 2245,740 1593.81,740 cw(c1593.81,795.67) 1538.14,796.04 1541.55,1306.87 cw(c1620.2,1306.34)
NetC10_2 on Bottom Layer "NETC10_2_L04_P002" (solid, pour order 2): 354.99,1384.99 1430,1385 cw(c1430,1315) 1500,1315 1500,800 cw(c1440.01,799.99) 1440,740 330,740 cw(c330,820) 250,820 250,1280 cw(c354.99,1280)
GND on Layer 2 "GND_L03_P000" (solid, pour order 0): 345,1385 2245,1385 cw(c2245,1295) 2335,1295 2335,95 cw(c2260,95) 2260,20 345,20 cw(c345,115) 250,115 250,1290 cw(c345,1290)
GND on Layer 1 "GND_L02_P004" (solid, pour order 4): 345,1385 2240,1385 cw(c2240,1287.34) 2337.66,1287.34 2337.66,90.25 cw(c2263.6,90.24) 2263.6,16.18 348.82,16.18 cw(c348.82,115) 250,115 250,1290 cw(c345,1290)

## Silkscreen, mask and mechanical layers (free items; w line width, h text height)
Bottom Overlay:
  text "8-25V" at 1628,72 h35
Bottom Solder:
  text "m6r3k @2025" at 1113,1277 h35

## Text inside footprints (layer, text, board x,y; h text height)
Input: Bottom Overlay "+" at 1865,485.97 h45
Output: Bottom Overlay "+" at 770,532.5 h45 r180